# Altium PCB BattBoard.PcbDoc
Units mil, origin at the board's own origin, x right, y up, seen from the top; angles counter-clockwise.
Board outline 4473.33 x 4473.33 mil, 2 copper layers (Top Layer, Bottom Layer); 106 components, 71 nets, 399 pads, 54 vias.
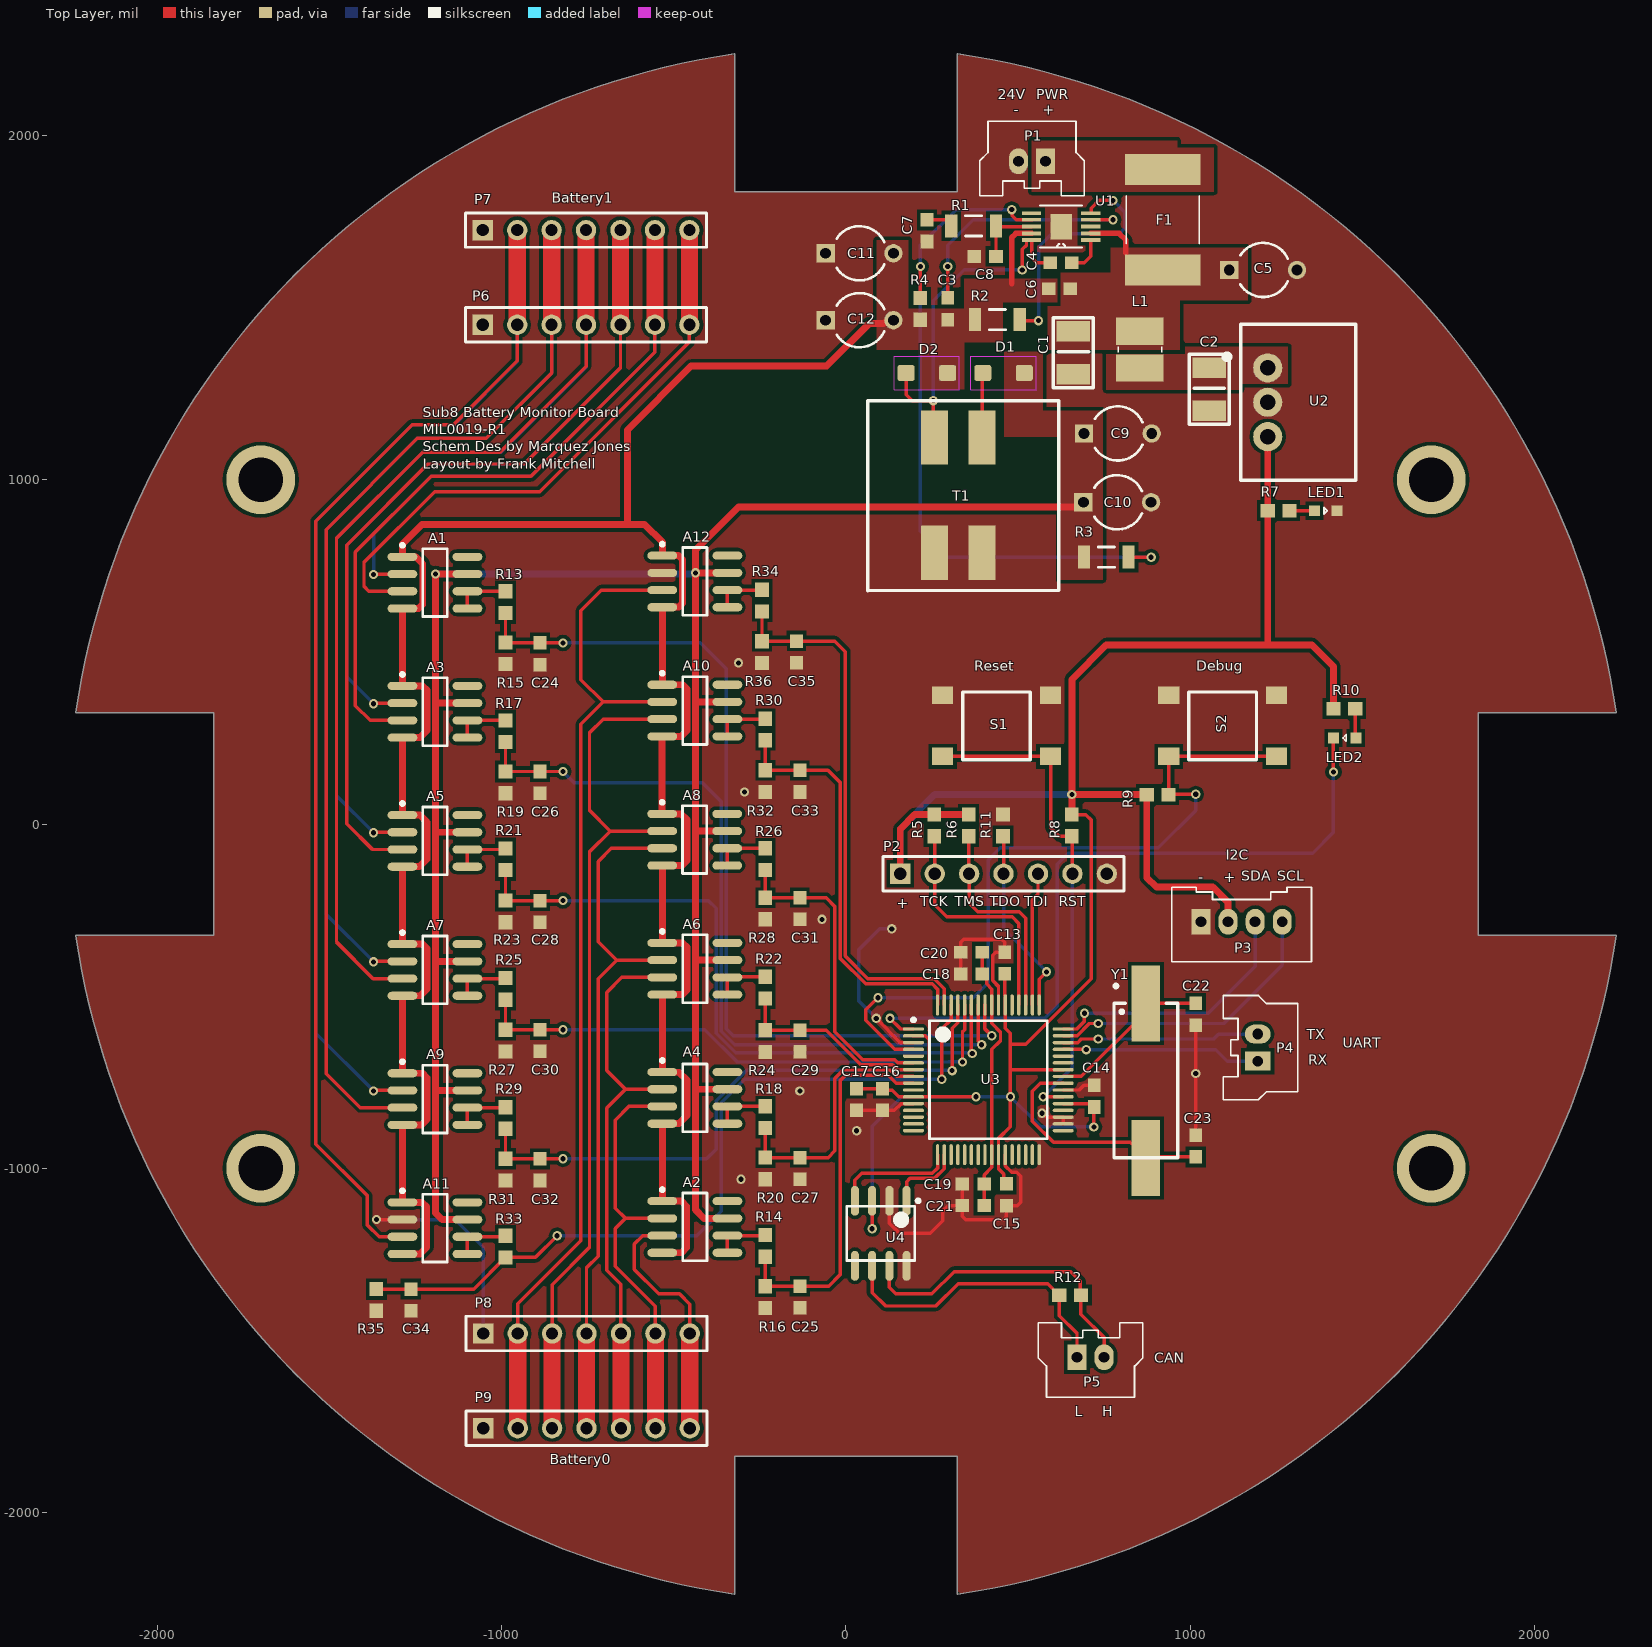
[diagram p0: Top Layer view]
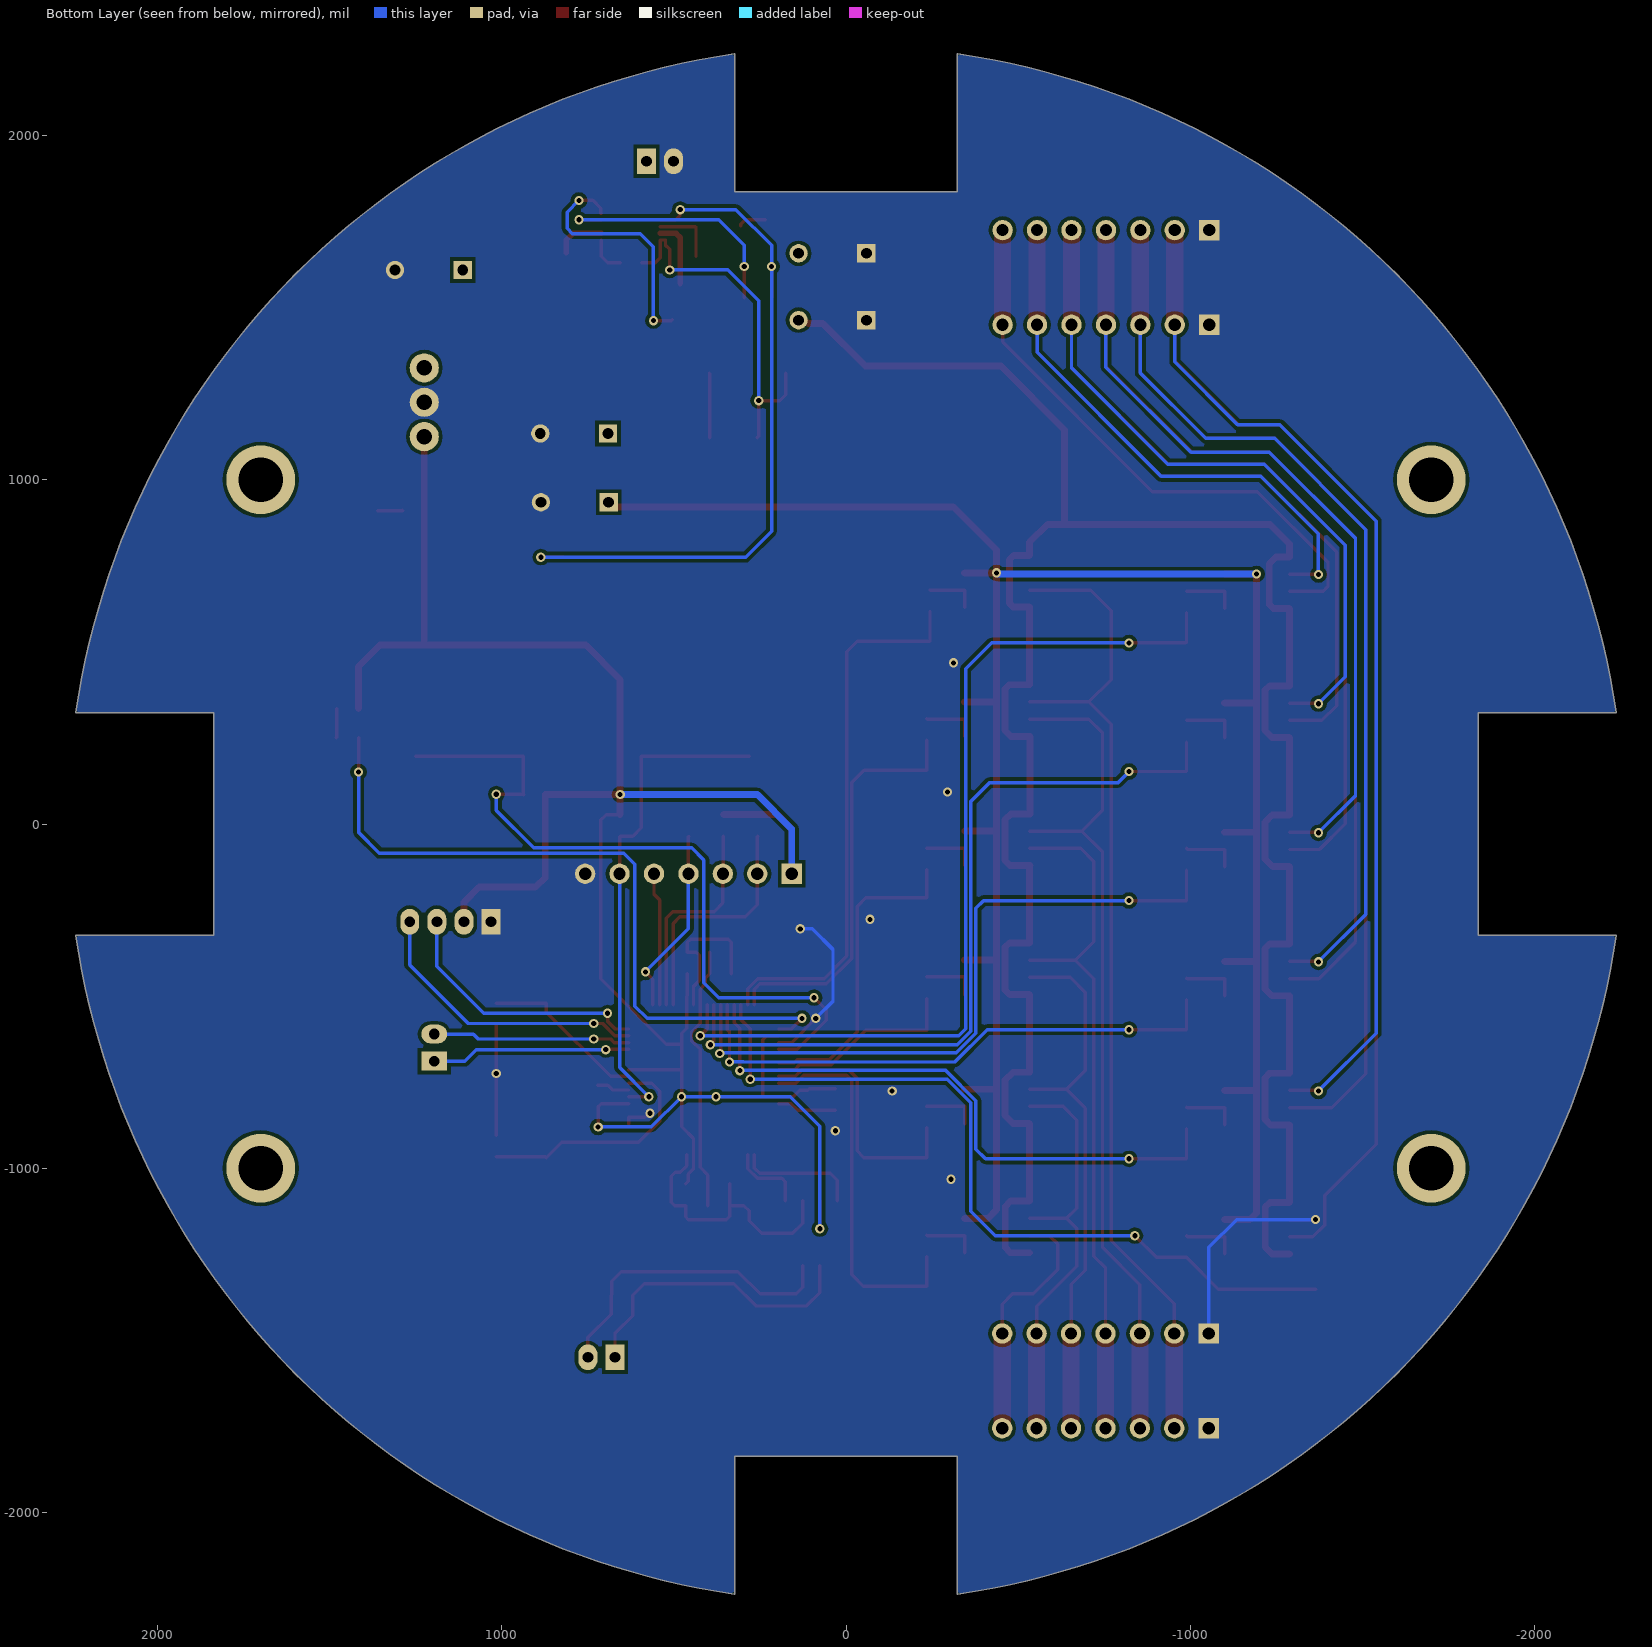
[diagram p1: Bottom Layer view, seen from below]

## Layer stack, top to bottom
Top Solder: solder mask 0.4, Solder Resist, Dk 3.5
Top Layer: signal copper 1.4
Dielectric 1: dielectric 12.6, FR-4, Dk 4.8
Bottom Layer: signal copper 1.4
Bottom Solder: solder mask 0.4, Solder Resist, Dk 3.5

## Board outline
-2236.67,-323.85 -1836.67,-323.85 -1836.67,323.85 -2236.67,323.85 cw(c0,0) -323.85,2236.67 -323.85,1836.67 323.85,1836.67 323.85,2236.67 cw(c0,0) 2236.67,323.85 1836.67,323.85 1836.67,-323.85 2236.67,-323.85 cw(c0,0) 323.85,-2236.67 323.85,-1836.67 -323.85,-1836.67 -323.85,-2236.67 cw(c0,0)

## Design rules (kind name [scope] priority, off if disabled: settings)
Clearance [All] p1: gap=10 ignorepadtopadclearanceinfootprint=FALSE except(0: Arc-Hole Track-Hole SMDPad-Hole THPad-Hole Via-Hole Fill-Hole Poly-Hole Region-Hole Text-Hole; 5: Track-Track Track-SMDPad SMDPad-SMDPad; 7: Track-Via)
HoleSize [All] p1: absolutevalues=TRUE maxlimit=150 minlimit=10 maxpercent=80.000 minpercent=20.000
MinimumAnnularRing [All] p1: minimumring=7
MinimumSolderMaskSliver [All] p1: minsoldermaskwidth=1
PolygonConnect PolygonConnect_2 [All vs IsNamedPolygon('top_gnd') Or  IsNamedPolygon('-12v_poly') Or  IsNamedPolygon('bottom_gnd') Or  IsNamedPolygon('+12v_poly') Or  IsNamedPolygon('cap_poly') Or  IsNamedPolygon('24v_poly') Or  IsNamedPolygon('vfused_poly')] p1: connectstyle=Direct reliefconductorwidth=10 reliefentries=4 polygonreliefangle="90 Angle" airgapwidth=10
PolygonConnect PolygonConnect_1 [All vs IsNamedPolygon('top_gnd')] p2: connectstyle=Direct reliefconductorwidth=10 reliefentries=4 polygonreliefangle="90 Angle" airgapwidth=10
PolygonConnect [All] p3: connectstyle=Relief reliefconductorwidth=10 reliefentries=4 polygonreliefangle="90 Angle" airgapwidth=10
RoutingVias [All] p1: holewidth=10 width=22 viastyle="Through Hole" minholewidth=10 minwidth=22 maxholewidth=100 maxwidth=150
SilkToSolderMaskClearance [IsPad] p1: minsilkscreentomaskgap=5 clearancetoexposedcopper=TRUE
SolderMaskExpansion [All] p1: expansion=4
Width [All] p1: maxlimit=150 minlimit=8 preferedwidth=10
27 further rules are at their usual default settings.

## Classes and differential pairs
component class Tiva_C_Base: C13 C14 C15 C16 C17 C18 C19 C20 C21 C22 C23 LED1 LED2 P3 P4 P5 R5 R6 R7 R8 R9 R10 R11 R12 S1 S2 U3 U4 Y1
component class Power: C1 C2 C3 C4 C5 C6 C7 C8 C9 C10 C11 C12 D1 D2 L1 P1 R1 R2 R3 R4 T1 U1 U2
component class Batt_Op_Amp: A1 A2 A3 A4 A5 A6 A7 A8 A9 A10 A11 A12 C24 C25 C26 C27 C28 C29 C30 C31 C32 C33 C34 C35 P6 P7 P8 P9 R13 R14 R15 R16 R17 R18 R19 R20 R21 R22 R23 R24 R25 R26 R27 R28 R29 R30 R31 R32 R33 R34 R35 R36

## Components (designator, comment, footprint, x,y, rotation, side; value= is the part's Value field where it differs from the comment)
A1 "INA105LKU/2K5" SOIC-8N -1194.02,701 r0 top
A2 "INA105LKU/2K5" SOIC-8N -439.02,-1170.5 r0 top
A3 "INA105LKU/2K5" SOIC-8N -1194.02,326 r0 top
A4 "INA105LKU/2K5" SOIC-8N -439.02,-795.5 r0 top
A5 "INA105LKU/2K5" SOIC-8N -1194.02,-49 r0 top
A6 "INA105LKU/2K5" SOIC-8N -439.02,-420.5 r0 top
A7 "INA105LKU/2K5" SOIC-8N -1194.02,-424 r0 top
A8 "INA105LKU/2K5" SOIC-8N -439.53,-45.5 r0 top
A9 "INA105LKU/2K5" SOIC-8N -1194.02,-799 r0 top
A10 "INA105LKU/2K5" SOIC-8N -439.02,329.5 r0 top
A11 "INA105LKU/2K5" SOIC-8N -1194.02,-1174 r0 top
A12 "INA105LKU/2K5" SOIC-8N -439.02,704.5 r0 top
C1 "Cap" CAP1210 660,1432.09 r90 top value=10uF
C2 "Cap" CAP1210 1055,1325.98 r90 top value=10uF
C3 "EEHZA1H101P" CAPC0603 295.48,1496.5 r270 top value=0.1uF
C4 "Cap" CAPC0603 624.37,1630.15 r180 top value=0.1uF
C5 "Cap2" CAPR5-4X5 1211.69,1609.33 r0 top value=10uF
C6 "Cap" CAPC0603 620.43,1554.88 r180 top value=1uF
C7 "Cap" CAPC0603 234.96,1723.5 r270 top value=0.15uF
C8 "Cap" CAPC0603 404.21,1648.85 r180 top value=0.33uF
C9 "Cap2" CAPR5-4X5 789.49,1134.53 r0 top value=22uF
C10 "Cap2" CAPR5-4X5 787.91,934.53 r0 top value=22uF
C11 "Cap2" CAPR5-4X5 39.21,1657.75 r0 top value=22uF
C12 "Cap2" CAPR5-4X5 39.21,1463.42 r0 top value=22uF
C13 "Cap" CAPC0603 460.98,-404 r90 top value=0.1uF
C14 "Cap" CAPC0603 720.98,-790.5 r90 top value=0.1uF
C15 "Cap" CAPC0603 465.98,-1076.99 r270 top value=0.1uF
C16 "Cap" CAPC0603 105.98,-800.5 r270 top value=0.1uF
C17 "Cap" CAPC0603 30.98,-800.22 r270 top value=2.0uF
C18 "Cap" CAPC0603 364.49,-435.5 r180 top value=0.1uF
C19 "Cap" CAPC0603 369.49,-1045.5 r180 top value=0.1uF
C20 "Cap" CAPC0603 364.49,-372.5 r180 top value=1.0uF
C21 "Cap" CAPC0603 369.49,-1108.49 r180 top value=2.2uF
C22 "Cap" CAPC0603 1015.98,-552.5 r270 top value=10pF
C23 "Cap" CAPC0603 1015.98,-935.5 r90 top value=10pF
C24 "Cap" CAPC0603 -889.02,494.5 r270 top value=100nF
C25 "Cap" CAPC0603 -134.02,-1374 r270 top value=100nF
C26 "Cap" CAPC0603 -889.02,121 r270 top value=100nF
C27 "Cap" CAPC0603 -134.02,-1000.5 r270 top value=100nF
C28 "Cap" CAPC0603 -889.02,-254 r270 top value=100nF
C29 "Cap" CAPC0603 -134.02,-630.5 r270 top value=100nF
C30 "Cap" CAPC0603 -889.02,-629 r270 top value=100nF
C31 "Cap" CAPC0603 -134.02,-245.5 r270 top value=100nF
C32 "Cap" CAPC0603 -889.02,-1004 r270 top value=100nF
C33 "Cap" CAPC0603 -134.02,124.5 r270 top value=100nF
C34 "Cap" CAPC0603 -1264.02,-1382.5 r270 top value=100nF
C35 "Cap" CAPC0603 -144.02,499.5 r270 top value=100nF
D1 "Schottky" DSS16UTR 457.64,1310 r180 top
D2 "Schottky" DSS16UTR 234.96,1310 r0 top
F1 "PTC Fuse" PTC7451X11N 920,1755 r270 top value=1.1A
L1 "Inductor" RLS567 853.7,1378.15 r270 top
LED1 "LED" LED0603 1393.31,910 r0 top
LED2 "LED" LED0603 1448.42,250 r180 top
P1 "2-pin Vert Sherlock" MOLEX-HDR-1X2-SHERLOCK-VERT 579.72,1925 r0 top
P2 "Header 7" HDR1X7 157.68,-144.55 r0 top
P3 "" MOLEX-HDR-1X4-SHERLOCK-VERT 1030.98,-284 r180 top
P4 "2-pin Vert Sherlock" MOLEX-HDR-1X2-SHERLOCK-VERT 1195.98,-689 r270 top
P5 "2-pin Vert Sherlock" MOLEX-HDR-1X2-SHERLOCK-VERT 670.98,-1549 r180 top
P6 "Header 7" HDR1X7 -1055,1450 r0 top
P7 "Header 7" HDR1X7 -1055,1725 r0 top
P8 "Header 7" HDR1X7 -1053.7,-1480 r0 top
P9 "Header 7" HDR1X7 -1053.7,-1755 r0 top
R1 "Res" RES1206 370.74,1737.42 r180 top value=11.8k
R2 "Res" RES1206 439.96,1465 r180 top value=400k
R3 "Res" RES1206 756.02,775 r0 top value=29.4k
R4 "Res" RES0603 216.26,1496.5 r270 top value=1k
R5 "Res" RES0603 255.98,-4.08 r270 top value=10k
R6 "Res" RES0603 355.98,-4.08 r270 top value=10k
R7 "Res" RES0603 1256.5,910 r0 top value=1k
R8 "Res" RES0603 655.98,-4.08 r270 top value=10k
R9 "Res" RES0603 905,85.45 r0 top value=10k
R10 "Res" RES0603 1447.44,335 r0 top value=1k
R11 "Res" RES0603 455.98,-4.08 r90 top value=10k
R12 "Res" RES0603 650.98,-1368.55 r0 top value=120
R13 "Res" RES0603 -989.02,644.5 r270 top value=10k
R14 "Res" RES0603 -234.02,-1225.5 r270 top value=10k
R15 "Res" RES0603 -989.02,496 r270 top value=10k
R16 "Res" RES0603 -234.02,-1374 r270 top value=10k
R17 "Res" RES0603 -989.02,269.5 r270 top value=10k
R18 "Res" RES0603 -234.02,-851.4 r270 top value=10k
R19 "Res" RES0603 -989.02,121 r270 top value=10k
R20 "Res" RES0603 -234.02,-1000.5 r270 top value=10k
R21 "Res" RES0603 -989.02,-102.5 r270 top value=10k
R22 "Res" RES0603 -234.02,-475.5 r270 top value=10k
R23 "Res" RES0603 -989.02,-254 r270 top value=10k
R24 "Res" RES0603 -234.02,-630.5 r270 top value=10k
R25 "Res" RES0603 -989.02,-479 r270 top value=10k
R26 "Res" RES0603 -234.02,-101.99 r270 top value=10k
R27 "Res" RES0603 -989.02,-629 r270 top value=10k
R28 "Res" RES0603 -234.02,-245.5 r270 top value=10k
R29 "Res" RES0603 -989.02,-854 r270 top value=10k
R30 "Res" RES0603 -234.02,274.5 r270 top value=10k
R31 "Res" RES0603 -989.02,-1004 r270 top value=10k
R32 "Res" RES0603 -234.02,124.5 r270 top value=10k
R33 "Res" RES0603 -989.02,-1227.5 r270 top value=10k
R34 "Res" RES0603 -244.02,648.99 r270 top value=10k
R35 "Res" RES0603 -1364.02,-1382.5 r270 top value=10k
R36 "Res" RES0603 -244.02,499.5 r270 top value=10k
S1 "Button" PTS645xxxxSMTR92 437.28,285 r180 top
S2 "Button" PTS645xxxxSMTR92 1093.98,285 r180 top
T1 "Ind Coup" SOP4 257.56,787.93 r90 top
U1 "TPS54160DGQ" SOIC-11 625,1735.31 r180 top
U2 "R-78C3.3-1.0" R-78C3.3-1.0 1225,1325 r270 top
U3 "TM4C123GH6PMT7R" TM4C123GH6PMT7R_L 413.5,-743.13 r0 top value=Value
U4 "SN65HVD230" SOIC-8pin 100.98,-1189 r270 top
Y1 "ABLS2-12.000MHZ-D4Y-T" HC49/US 870.98,-745.5 r270 top

## Footprints (in the part's own frame and the unit in brackets; to place one, negate y for a bottom-side part, rotate by r counter-clockwise, add the part's x,y. Pads: shape width x height; smd on the part's side, far side on the other; paste and mask are expansions set on the pad)
CAP1210 [mm]
  rect 1.5x2.5 smd: 1(-0.02,0) 2(-3.2,0)
  silkscreen extent -4.2,-1.48 0.97,1.48, body extent -3.22,-1.25 0,1.26, height 2.5
CAPC0603 [mm] "Chip Capacitor, 2-Leads, Body 1.60x0.80mm, IPC Medium Density"
  rect 1x0.95 smd: 1(-0.8,0) 2(0.8,0)
  body extent -0.88,-0.48 0.87,0.48, height 0.8
CAPR5-4X5 [mm] "Capacitor; 2 Leads"
  rect 1.35x1.35 hole 0.8: 1(-2.5,0)
  round 1.35 hole 0.8: 2(2.5,0)
  silkscreen extent -1.69,-2 1.82,2
DSS16UTR [mm] "Diode Schottky 60V 1A"
  rrect25% 1.25x1.16 smd: A(1.53,0) C(-1.53,0)
  Top Layer keep-out lines w0.05: 2.405,1.225 -2.405,1.225 -2.405,-1.225 2.405,-1.225 2.405,1.225
HC49/US [mm]
  rect 5.6x2.1 smd: 1(-5.7,0) 2(5.7,0)
  silkscreen extent -7.11,-2.35 5.7,2.35, body extent -6.35,-2.35 6.35,2.35, height 3.16
HDR1X7 [mm] "Connector; Header; 7 Position"
  rect 1.5x1.5 hole 0.9: 1(0,0)
  round 1.5 hole 0.9: 2(2.54,0) 3(5.08,0) 4(7.62,0) 5(10.16,0) 6(12.7,0) 7(15.24,0)
  silkscreen extent -1.27,-1.27 16.51,1.27
LED0603 [mm] "Chip LED, 2-Leads, Body 1.60x0.80mm, IPC Medium Density"
  rect 0.8x0.8 smd: A(-0.825,0) C(0.825,0)
  silkscreen extent -0.12,-0.25 0.12,0.25, body extent -0.88,-0.48 0.87,0.47, height 0.8
MOLEX-HDR-1X2-SHERLOCK-VERT [mil]
  rect 55x75 hole 31.5: 1(0,0)
  oval 55x75 hole 31.5: 2(-78.74,0)
  silkscreen extent -191,-100 112,116, body extent -192,-102 112,117, height 335
MOLEX-HDR-1X4-SHERLOCK-VERT [mm]
  rect 1.397x1.905 hole 0.8: 1(0,0)
  oval 1.397x1.905 hole 0.8: 2(-2,0) 3(-4,0) 4(-6,0)
  silkscreen extent -8.15,-2.55 2.15,2.95, body extent -8.13,-2.57 2.17,2.98, height 8.5
PTC7451X11N [mm] "Chip PTC, 2920, 7351 metric 2-Leads, Body 7.36x5.12mm, IPC Medium Density"
  rect 2.3x5.6 smd: 1(-3.7,0) 2(3.7,0)
  silkscreen extent -1.75,-2.7 1.75,2.7, body extent -3.99,-2.72 3.99,2.72, height 1.15
PTS645xxxxSMTR92 [mm] "PTS645 Series SMT 6 mm Tactile Switch"
  rect 1.555x1.3 smd: A(-3.975,2.25) A(3.975,2.25) B(-3.975,-2.25) B(3.975,-2.25)
  silkscreen extent -2.5,-2.5 2.5,2.5, body extent -3,-3 3,3, height 4.5
R-78C3.3-1.0 [mm] "CONV DC/DC 1A 3.3V OUT SIP VERT"
  round 2.15 hole 1.15: 1(0,0) 2(2.54,0) 3(5.08,0)
  Bottom Layer region: 0.457,-3.048
  silkscreen extent -3.21,-3.05 8.29,6.5, body extent -3.3,-2.03 8.38,6.6, height 10.4
RES0603 [mm] "Chip Resistor, 2-Leads, Body 1.60x0.80mm, IPC Medium Density"
  rect 1.05x1 smd: 1(-0.8,0) 2(0.8,0)
  body extent -0.88,-0.48 0.87,0.47, height 0.8
RES1206 [mm] "Chip Resistor, 2-Leads, Body 3.20x1.60mm, IPC Medium Density"
  rect 0.9x1.7 smd: 1(-1.65,0) 2(1.65,0)
  silkscreen extent -0.6,-0.75 0.6,0.75, body extent -1.73,-0.87 1.73,0.88, height 0.7
RLS567 [mm]
  rect 2x3.5 smd: 1(-1.35,0) 2(1.35,0)
  silkscreen extent -0.2,-1.6 0.2,1.6, body extent -2.54,-1.9 2.54,1.91, height 2.6
SOIC-8N [mm] "LM317 Footprint"
  oval 2.2x0.6 smd: 1(-2.4,1.905) 2(-2.4,0.635) 3(-2.4,-0.635) 4(-2.4,-1.905) 5(2.4,-1.905) 6(2.4,-0.635) 7(2.4,0.635) 8(2.4,1.905)
  silkscreen extent -2.52,-2.5 0.9,2.88, body extent -2,-2.5 2,2.5, height 1.75
SOIC-8pin [mm] "For 296-1345-1-ND"
  oval 2.2x0.6 smd: 1(-2.4,1.905) 2(-2.4,0.635) 3(-2.4,-0.635) 4(-2.4,-1.905) 5(2.4,-1.905) 6(2.4,-0.635) 7(2.4,0.635) 8(2.4,1.905)
  silkscreen extent -2.52,-2.5 2,2.88, body extent -2,-2.5 2,2.5, height 1.75
SOIC-11 [mil]
  rect 56x11 smd: 1(-86,39) 2(-86,20) 3(-86,0) 4(-86,-20) 5(-86,-39) 6(86,-39) 7(86,-20) 8(86,0) 9(86,20) 10(86,39)
  rect 62x74 smd: 11(0,0)
  silkscreen extent -61,-61 61,61
SOP4 [mm]
  rect 4x2 smd: 1(0,0) 2(0,-3.5) 3(8.5,-3.5) 4(8.5,0)
  silkscreen extent -2.8,-9.16 11.22,4.92
TM4C123GH6PMT7R_L [mm]
  oval 1.55x0.25 smd paste-0.102 mask+0.051: 1(-5.525,3.75) 2(-5.525,3.25) 3(-5.525,2.75) 4(-5.525,2.25) 5(-5.525,1.75) 6(-5.525,1.25) 7(-5.525,0.75) 8(-5.525,0.25) 9(-5.525,-0.25) 10(-5.525,-0.75) 11(-5.525,-1.25) 12(-5.525,-1.75) 13(-5.525,-2.25) 14(-5.525,-2.75) 15(-5.525,-3.25) 16(-5.525,-3.75) 33(5.525,-3.75) 34(5.525,-3.25) 35(5.525,-2.75) 36(5.525,-2.25) 37(5.525,-1.75) 38(5.525,-1.25) 39(5.525,-0.75) 40(5.525,-0.25) 41(5.525,0.25) 42(5.525,0.75) 43(5.525,1.25) 44(5.525,1.75) 45(5.525,2.25) 46(5.525,2.75) 47(5.525,3.25) 48(5.525,3.75)
  oval 0.25x1.55 smd paste-0.102 mask+0.051: 17(-3.75,-5.525) 18(-3.25,-5.525) 19(-2.75,-5.525) 20(-2.25,-5.525) 21(-1.75,-5.525) 22(-1.25,-5.525) 23(-0.75,-5.525) 24(-0.25,-5.525) 25(0.25,-5.525) 26(0.75,-5.525) 27(1.25,-5.525) 28(1.75,-5.525) 29(2.25,-5.525) 30(2.75,-5.525) 31(3.25,-5.525) 32(3.75,-5.525) 49(3.75,5.525) 50(3.25,5.525) 51(2.75,5.525) 52(2.25,5.525) 53(1.75,5.525) 54(1.25,5.525) 55(0.75,5.525) 56(0.25,5.525) 57(-0.25,5.525) 58(-0.75,5.525) 59(-1.25,5.525) 60(-1.75,5.525) 61(-2.25,5.525) 62(-2.75,5.525) 63(-3.25,5.525) 64(-3.75,5.525)
  silkscreen extent -5.65,-4.35 4.35,4.55, body extent 0,0 0.25,0.25, height 0.25

## Part data
C1 C2: library part CAP1210, "CAP CER 10UF 50V 20% X5R 1210", Supplier Part Number 1=587-2225-1-ND, Supplier 1=Digi-Key
C3: library part Cap, Supplier Part Number 1=1276-1000-1-ND, Supplier 1=Digi-Key
C4 C6 C7 C8 C13 C14 C15 C16 C17 C18 C19 C20 C21 C22 C23 C24 C25 C26 C27 C28 C29 C30 C31 C32 C33 C34 C35: Supplier Part Number 1=1276-1000-1-ND, Supplier 1=Digi-Key
C5 C9 C10 C11 C12: "Capacitor", PackageDescription="Capacitor; 2 Leads", PackageReference=CAPR5-4X5, Published=23-Sep-2002, Publisher="Altium Limited"
D1 D2: "Schottky Diode Template"
F1: library part PTC_Fuse, Supplier Part Number 1=507-1744-1-ND, Supplier 1=Digi-Key
L1: Inductance=RLS567, Supplier Part Number 1=?, Supplier 1=Digi-Key
LED1: Color=Green, Supplier Part Number 1=754-1122-1-ND, Supplier 1=Digi-Key
LED2: Color=Blue, Supplier Part Number 1=754-1122-1-ND, Supplier 1=Digi-Key
P1 P4 P5: library part MOLEX-HDR-1x2-SHERLOCK_VERT, "Header, Molex, 2mm Pitch Sherlock Header, Single Row, Vertical, 2 Circuits, Length 3.3mm, 0353620250"
P2 P6 P7 P8 P9: "Header, 7-Pin", LatestRevisionDate=17-Jul-2002, LatestRevisionNote="Re-released for DXP Platform.", Publisher="Altium Limited"
P3: library part MOLEX-HDR-1x4-SHERLOCK_VERT, "Header, Molex, 2mm Pitch Sherlock Header, Single Row, Vertical, 4 Circuits, Length 3.3mm, 0353620450"
R1 R2 R3 R4 R5 R6 R7 R8 R9 R10 R11 R12 R13 R14 R15 R16 R17 R18 R19 R20 R21 R22 R23 R24 R25 R26 R27 R28 R29 R30 R31 R32 R33 R34 R35 R36: Supplier Part Number 1=RMCF0603JT10K0CT-ND, Supplier 1=Digi-Key
S1 S2: "SPST Button", Supplier Part Number 1=CKN9087CT-ND, Supplier 1=Digi-Key
T1: library part "Trans Cupl", "Transformer (Coupled Inductor Model)", LatestRevisionDate=17-Jul-2002, LatestRevisionNote="Re-released for DXP Platform.", PackageDescription="Transformer; 4 Leads", PackageReference=TRF_4, Published=8-Jun-2000, Publisher="Altium Limited"
U1: "Buck Switching Regulator IC Positive Adjustable 0.8V 1 Output 1.5A 10-TFSOP, 10-MSOP _0.118, 3.00mm Width_ Exposed Pad", Package="TFSOP-10 Texas Instruments", Availability=Unavailable, MF="Texas Instruments", MP=TPS54160DGQ, Price=None, SnapEDA_Link=https://www.snapeda.com/parts/TPS54160DGQ/Texas%20Instruments/view-part/393939/?ref=snap
U2: "CONV DC/DC 1A 3.3V OUT SIP VERT", Supplier Part Number 1=945-1394-5-ND, Supplier 1=Digi-Key
U3: "Imported", Alternate_PartNumber=TM4C123GH6PMT, Manufacturer="Texas Instruments", PartNumber=TM4C123GH6PMTR, CompType=IC, MountType=SMT, PackageReference=PM0064A, PIN_COUNT=64, RefDes=RefDes, RoHS=Y, TYPE=TYPE
U4: "3.3V CAN Bus Transceiver"
Y1: "12MHz ±30ppm Crystal 18pF 50 Ohm -40°C ~ 85°C Surface Mount HC49/US", Supplier Part Number 1=535-9869-1-ND, Supplier 1=Digi-Key

## Free pads (board coordinates)
  round 200 hole 130: ""(-1700,-1000) ""(-1700,1000) ""(1700,-1000) ""(1700,1000)

## Via types
v1: diameter 27, hole 15, Top Layer to Bottom Layer, tented both sides, 54 vias

## Nets (pads, with @x,y where several pads share a name; then routed paths per layer and width w, separated by ;. In a path a pad name is that pad's centre, name@x,y a point inside that pad or via, vN(x,y) a via of type N, cw(c..) or ccw(c..) an arc to the next point about the centre after c; other vN are vias at no path point)
3V3: C13.1 C14.1 C15.1 C16.1 C17.1 P2.1 P3.2 R5.1 R6.1 R7.1 R8.1 R9.1 R10.1 U2.3 U3.2 U3.11 U3.26 U3.37 U3.42 U3.54 U4.3 | length 7196.9
  Top Layer w10: C17.1 105.71,-768.73 C16.1 110.5,-773.52 133.83,-773.52 152.66,-792.35 U3.11 242.24,-792.35 ; v1(75.98,-1175.5) U4.3 ; U3.2 230.43,-615.18 242.24,-626.99 242.24,-792.35 ; v1(377.68,-792.35) 242.24,-792.35 ; C13.1 460.98,-498.45 462.72,-500.18 U3.54 462.72,-592.86 477.68,-607.82 477.68,-639.61 ; C15.1 458.38,-1037.89 458.38,-1016.67 443.03,-1001.32 U3.26 443.03,-913.65 477.68,-879 v1(477.68,-792.35) 477.68,-715.98 ; U3.37 711.02,-812.03 C14.1 720,-822.98 v1(720,-880) ; U3.42 480.05,-713.61 477.68,-715.98 ; R8.1 696.3,27.42 712.01,11.71 712.01,-449.37 521.77,-639.61 477.68,-639.61 ; 477.68,-715.98 477.68,-639.61
  Top Layer w20: P2.1 157.68,-14.55 199.65,27.42 R5.1 R6.1 ; R8.1 v1(655.98,85.45) ; P3.2 1109.72,-227.31 1065.42,-183 901.51,-183 873.5,-155 R9.1 v1(655.98,85.45) ; U2.3 R7.1 1225,522.95 1222.05,520 ; R10.1 1415.94,458.03 1353.98,520 1222.05,520 ; v1(655.98,85.45) 655.98,420.09 755.89,520 1222.05,520
  Bottom Layer w10: v1(75.98,-1175.5) 75.98,-877.9 161.54,-792.35 v1(377.68,-792.35) v1(477.68,-792.35) 565.33,-880 v1(720,-880)
  Bottom Layer w20: P2.1 157.68,-14.55 257.68,85.45 v1(655.98,85.45)
24V: F1.1 P1.1
+12V: A1.7 A2.7 A3.7 A4.7 A5.7 A6.7 A7.7 A8.7 A9.7 A10.7 A11.7 A12.7 C9.1 C10.1 D1.C R3.1 | length 6845.4
  Top Layer w20: A11.7 -1172.87,-1149 -1192.32,-1129.55 -1192.32,-774.55 ; A9.7 -1191.77,-774 -1192.32,-774.55 ; A7.7 -1191.77,-399 -1192.32,-399.55 ; A5.7 -1191.77,-24 -1192.32,-24.55 ; A3.7 -1192.05,351 -1192.32,350.72 ; A1.7 v1(-1192.32,726) -1192.32,350.72 ; A8.7 -437.32,-20.5 ; A2.7 -412.32,-1145.5 -437.32,-1120.5 -437.32,-769.55 ; A4.7 -436.38,-770.5 -437.32,-769.55 ; A6.7 -436.38,-395.5 -437.32,-394.55 ; A10.7 -437.32,354.5 ; A12.7 v1(-437.32,729.5) ; C10.1 675.33,920.37 -312.4,920.37 -437.32,795.45 v1(-437.32,729.5) ; -1192.32,-774.55 -1192.32,-399.55 ; -1192.32,-399.55 -1192.32,-24.55 ; -1192.32,-24.55 -1192.32,350.72 ; -437.32,-769.55 -437.32,-394.55 ; -437.32,-394.55 -437.32,-20.5 ; -437.32,-20.5 -437.32,354.5 ; -437.32,354.5 v1(-437.32,729.5)
  Bottom Layer w20: v1(-1192.32,726) -1192.24,725.92 -440.91,725.92 v1(-437.32,729.5)
-12V: A1.1 A1.4 A2.1 A2.4 A3.1 A3.4 A4.1 A4.4 A5.1 A5.4 A6.1 A6.4 A7.1 A7.4 A8.1 A8.4 A9.1 A9.4 A10.1 A10.4 A11.1 A11.4 A12.1 A12.4 C3.2 C6.2 C11.2 C12.2 D2.A R2.2 R4.2 U1.9 | length 7733.9
  Top Layer w16: 481.26,1570 481.26,1702.84 493.73,1715.31 U1.9
  Top Layer w20: A11.4 -1288.44,-1248.93 -1237.95,-1248.93 -1217.64,-1228.62 -1217.64,-1112.31 -1230.94,-1099 A11.1 A9.4 -1233.7,-874 -1217.32,-857.62 -1217.32,-737.13 -1230.45,-724 A9.1 A7.4 -1237.2,-499 -1217.32,-479.12 -1217.32,-361.32 -1229.65,-349 A7.1 A5.4 -1287.94,-123.44 -1238.44,-123.44 -1217.32,-102.32 -1217.32,5.06 -1238.07,25.81 -1288.31,25.81 A5.1 A3.4 -1237.52,251 -1217.32,271.2 -1217.32,388.68 -1229.65,401 A3.1 A1.4 -1288.45,626.06 -1241.16,626.06 -1229.45,637.77 -1229.45,756.12 -1248.64,775.31 -1287.81,775.31 A1.1 -1288.5,813.64 -1232.15,870 -635,870 ; A2.4 -478.13,-1245.5 -462.64,-1230 -462.64,-1110.81 -477.95,-1095.5 A2.1 A4.4 -532.81,-869.8 -484.97,-869.8 -462.32,-847.15 -462.32,-743.83 -484.96,-721.19 -532.81,-721.19 A4.1 A6.4 -475.2,-495.5 -462.32,-482.62 -462.32,-357.82 -474.65,-345.5 A6.1 -533.5,-121.01 A8.4 -476.87,-120.5 -462.32,-105.94 -462.32,12.85 -478.98,29.5 A8.1 -534.02,253.99 A10.4 -479.2,254.5 -462.32,271.38 -462.32,392.18 -474.65,404.5 A10.1 A12.4 -532.81,630.2 -485.47,630.2 -474.45,641.22 -474.45,767.79 -486.16,779.5 A12.1 -533.5,818.53 -584.97,870 -635,870 ; C12.2 131.29,1457.08 112.84,1457.08 109.34,1453.58 67.56,1453.58 -56.02,1330 -450,1330 -635,1145 -635,870
B0_C0_ADC_CH5: C35.1 R34.2 R36.1 U3.63 | length 1599.3
  Top Layer w10: R34.2 R36.1 C35.1 -32.87,531 -2.32,500.45 -2.32,-383.34 63.34,-449 256.53,-449 285.55,-478.02 U3.63
B0_C1_ADC_CH4: C33.1 R30.2 R32.1 U3.64 | length 1195.3
  Top Layer w10: R30.2 R32.1 C33.1 -52.32,156 -17.32,121 -17.32,-389.55 57.68,-464.55 250.87,-464.55 265.87,-479.55 U3.64
B0_C2_ADC_CH0: C31.1 R26.2 R28.1 U3.6 | length 922.4
  Top Layer w10: R26.2 R28.1 C31.1 -57.87,-214 -32.32,-239.55 -32.32,-603.34 48.89,-684.55 141.32,-684.55 150.69,-693.92 U3.6
B0_C3_ADC_CH1: C29.1 R22.2 R24.1 U3.7 | length 569.5
  Top Layer w10: R22.2 R24.1 C29.1 -57.87,-599 42.68,-699.55 135.1,-699.55 149.16,-713.61 U3.7
B0_C4_ADC_CH2: C27.1 R18.2 R20.1 U3.8 | length 752.4
  Top Layer w10: R18.2 R20.1 C27.1 -51.77,-969 -32.32,-949.55 -32.32,-739.28 -7.59,-714.55 128.89,-714.55 147.63,-733.29 U3.8
B0_C5_ADC_CH3: C25.1 R14.2 R16.1 U3.9 | length 1109.5
  Top Layer w10: R14.2 R16.1 C25.1 -50.28,-1342.5 -17.32,-1309.55 -17.32,-745.5 -1.38,-729.55 122.68,-729.55 146.1,-752.98 U3.9
B0_CELL0: A10.2 A12.3 P8.2 P9.2 | length 2937.7
  Top Layer w10: P8.2 -953.7,-1393.7 -770,-1210 -770,290 -705.5,354.5 ; A10.2 -705.5,354.5 ; A12.3 -710.5,679.5 -770,620 -770,419.01 -705.5,354.5
  Top Layer w50: P9.2 P8.2
B0_CELL1: A8.2 A10.3 P8.3 P9.3 | length 2493.5
  Top Layer w10: P8.3 -853.7,-1338.7 -745,-1230 -745,-81.01 -684.49,-20.5 ; A8.2 -684.49,-20.5 ; A10.3 -705.5,304.5 -745,265 -745,40.02 -684.49,-20.5
  Top Layer w50: P9.3 P8.3
B0_CELL2: A6.2 A8.3 P8.4 P9.4 | length 2039.2
  Top Layer w10: P8.4 -753.7,-1288.7 -720,-1255 -720,-449 -666.5,-395.5 ; A8.3 -681.5,-70.5 -720,-109 -720,-341.99 -666.5,-395.5 ; A6.2 -666.5,-395.5
  Top Layer w50: P9.4 P8.4
B0_CELL3: A4.2 A6.3 P8.5 P9.5 | length 1614.4
  Top Layer w10: P8.5 -653.7,-1337.31 -695,-1296.01 -695,-825 -640.5,-770.5 ; A4.2 -640.5,-770.5 ; A6.3 -650.94,-445.5 -695,-489.55 -695,-715.99 -640.5,-770.5
  Top Layer w50: P9.5 P8.5
B0_CELL4: A2.2 A4.3 P8.6 P9.6 | length 1227.5
  Top Layer w10: P8.6 -553.7,-1401.3 -670,-1285 -670,-1175 -640.5,-1145.5 ; A2.2 -640.5,-1145.5 ; A4.3 -630.5,-820.5 -670,-860 -670,-1115.99 -640.5,-1145.5
  Top Layer w50: P9.6 P8.6
B0_CELL5: A2.3 P8.7 P9.7 | length 728.8
  Top Layer w10: A2.3 -590.5,-1195.5 -615,-1220 -615,-1294 -544,-1365 -483.7,-1365 -453.7,-1395 P8.7
  Top Layer w50: P9.7 P8.7
B1_C0_ADC_CH6: C34.1 R33.2 R35.1 U3.62 | length 2306.6
  Top Layer w10: R35.1 C34.1 -1081.02,-1351.01 R33.2 -902.01,-1259 v1(-839.02,-1196.01) ; v1(278.35,-741.39) 278.35,-594.83 305.24,-567.94 U3.62
  Bottom Layer w10: v1(-839.02,-1196.01) -433.33,-1196.01 -362.32,-1125 -362.32,-809.55 -294.17,-741.39 v1(278.35,-741.39)
B1_C1_ADC_CH7: C32.1 R29.2 R31.1 U3.61 | length 1771.2
  Top Layer w10: R29.2 R31.1 C32.1 v1(-822.32,-972.5) ; v1(308.35,-716.39) 308.35,-593.88 324.92,-577.31 U3.61
  Bottom Layer w10: v1(-822.32,-972.5) -405.28,-972.5 -377.32,-944.55 -377.32,-803.34 -289.88,-715.89 307.85,-715.89 v1(308.35,-716.39)
B1_C2_ADC_CH8: C30.1 R25.2 R27.1 U3.60 | length 1622
  Top Layer w10: R25.2 R27.1 C30.1 v1(-822.32,-597.5) ; v1(338.35,-691.39) 338.35,-603.88 344.61,-597.62 U3.60
  Bottom Layer w10: v1(-822.32,-597.5) -410,-597.5 -316.11,-691.39 297.28,-691.39 297.78,-690.89 337.85,-690.89 v1(338.35,-691.39)
B1_C3_ADC_CH9: C28.1 R21.2 R23.1 U3.59 | length 1982.5
  Top Layer w10: R21.2 R23.1 C28.1 v1(-822.32,-222.5) ; U3.59 364.29,-664.03 v1(366.65,-666.39)
  Bottom Layer w10: v1(-822.32,-222.5) -399.37,-222.5 -377.32,-244.55 -377.32,-607.61 -320.38,-664.55 364.81,-664.55 v1(366.65,-666.39)
B1_C4_ADC_CH10: C26.1 R17.2 R19.1 U3.58 | length 2308
  Top Layer w10: R17.2 R19.1 C26.1 v1(-822.32,152.5) ; U3.58 383.98,-631.36 v1(394.02,-641.39)
  Bottom Layer w10: v1(-822.32,152.5) -790.28,120.45 -417.32,120.45 -362.32,65.45 -362.32,-601.39 -322.82,-640.89 393.52,-640.89 v1(394.02,-641.39)
B1_C5_ADC_CH11: C24.1 R13.2 R15.1 U3.57 | length 2681.4
  Top Layer w10: R13.2 R15.1 -987.52,526 C24.1 v1(-822.32,526) ; U3.57 403.66,-595.5 v1(423.35,-615.18)
  Bottom Layer w10: v1(-822.32,526) -422.87,526 -347.32,450.45 -347.32,-595.18 -327.32,-615.18 v1(423.35,-615.18)
B1_CELL0: A9.2 A11.3 P6.2 P7.2 | length 6074
  Top Layer w10: v1(-1372.32,-775.5) -1370.83,-774 A9.2 ; A11.3 -1356,-1199 -1390,-1165 -1390,-1080 -1540,-930 -1540,880 -1260,1160 -1140,1160 -955,1345 P6.2
  Top Layer w50: P6.2 P7.2
  Bottom Layer w10: v1(-1372.32,-775.5) -1540,-607.82 -1540,880 -1260,1160 -1137.14,1160 -955,1342.14 P6.2
B1_CELL1: A7.2 A9.3 P6.3 P7.3 | length 5481.4
  Top Layer w10: v1(-1372.32,-400.5) -1370.83,-399 A7.2 ; A9.3 -1411,-824 -1510,-725 -1510,855 -1245,1120 -1045,1120 -855,1310 P6.3
  Top Layer w50: P6.3 P7.3
  Bottom Layer w10: v1(-1372.32,-400.5) -1510,-262.82 -1510,855 -1245,1120 -1045,1120 -855,1310 P6.3
B1_CELL2: A5.2 A7.3 P6.4 P7.4 | length 4773.7
  Top Layer w10: v1(-1372.32,-25.5) -1370.83,-24 A5.2 ; A7.3 -1373.82,-449 -1480,-342.82 -1480,830 -1230,1080 -1005,1080 -755,1330 P6.4
  Top Layer w50: P6.4 P7.4
  Bottom Layer w10: v1(-1372.32,-25.5) -1480,82.18 -1480,830 -1230,1080 -1002.14,1080 -755,1327.14 P6.4
B1_CELL3: A3.2 A5.3 P6.5 P7.5 | length 4120.5
  Top Layer w10: v1(-1372.32,349.5) -1370.83,351 A3.2 ; A5.3 -1375.31,-74 -1450,0.69 -1450,810 -1214.36,1045.64 -934.36,1045.64 -655,1325 P6.5
  Top Layer w50: P6.5 P7.5
  Bottom Layer w10: v1(-1372.32,349.5) -1450,427.18 -1450,810 -1215,1045 -935,1045 -655,1325 P6.5
B1_CELL4: A1.2 A3.3 P6.6 P7.6 | length 3384.1
  Top Layer w10: v1(-1372.32,724.5) -1370.83,726 A1.2 ; A3.3 -1382.32,301 -1425,343.68 -1425,790 -1205,1010 -915,1010 -555,1370 P6.6
  Top Layer w50: P6.6 P7.6
  Bottom Layer w10: v1(-1372.32,724.5) -1372.32,842.68 -1205,1010 -915,1010 -555,1370 P6.6
B1_CELL5: A1.3 P6.7 P7.7 | length 1722.4
  Top Layer w10: A1.3 -1386,676 -1400,690 -1400,760 -1195,965 -890,965 -455,1400 P6.7
  Top Layer w50: P6.7 P7.7
BOOT: C4.1 U1.1 | length 110.3
  Top Layer w10: C4.1 692.3,1630.15 711,1648.85 U1.1
CAN_RX: U3.17 U4.4 | length 353.2
  Top Layer w10: U4.4 25.98,-1034.55 45.98,-1014.55 250.87,-1014.55 265.87,-999.55 U3.17
CAN_TX: U3.18 U4.1 | length 220.9
  Top Layer w10: U4.1 175.98,-1039.55 185.98,-1029.55 257.08,-1029.55 285.55,-1001.08 U3.18
CANH: P5.2 R12.2 U4.7 | length 912.7
  Top Layer w10: U4.7 125.98,-1345.88 145.1,-1365 248.94,-1365 313.94,-1300 652.68,-1300 680.98,-1328.31 680.98,-1367.06 R12.2 682.48,-1423.91 ; 682.48,-1424.36 749.72,-1491.6 P5.2
CANL: P5.1 R12.1 U4.6 | length 879.3
  Top Layer w10: U4.6 75.98,-1360.98 115,-1400 261.18,-1400 326.18,-1335 585.94,-1335 R12.1 619.49,-1427.61 ; 619.49,-1428.06 670.98,-1479.55 P5.1
COMP: C8.1 R1.1 U1.8 | length 188.5
  Top Layer w10: C8.1 435.7,1733.2 437.81,1735.31 U1.8
DBG_LED_n: LED2.C U3.1 | length 2109
  Top Layer w10: v1(127.68,-564.55) 158.62,-595.5 U3.1 ; v1(1415.94,151.14) LED2.C
  Bottom Layer w10: v1(127.68,-564.55) 577.68,-564.55 613.15,-529.08 613.15,-116.58 645,-84.73 1355.27,-84.73 1415.94,-24.06 v1(1415.94,151.14)
DBG_SW_n: R9.2 S2.A U3.4 | length 2160.8
  Top Layer w10: v1(92.68,-504.55) 57.68,-539.55 57.68,-570.61 141.61,-654.55 U3.4 ; R9.2 R9.2@937.49,86.44 ; v1(1015.91,86.44) R9.2@937.49,86.44 ; S2.A@1250.48,196.42 937.49,196.42 R9.2@937.49,86.44
  Bottom Layer w10: v1(92.68,-504.55) 369.02,-504.55 412.68,-460.89 412.68,-104.55 447.68,-69.55 907.12,-69.55 1015.91,39.23 v1(1015.91,86.44)
GND: A11.2 A12.2 C1.2 C2.2 C5.2 C7.2 C8.2 C9.2 C10.2 C11.1 C12.1 C13.2 C14.2 C15.2 C16.2 C17.2 C18.2 C19.2 C20.2 C21.2 C22.2 C23.2 C24.2 C25.2 C26.2 C27.2 C28.2 C29.2 C30.2 C31.2 C32.2 C33.2 C34.2 C35.2 LED1.C P1.2 P2.7 P3.1 P6.1 P7.1 P8.1 P9.1 R11.2 R15.2 R16.2 R19.2 R20.2 R23.2 R24.2 R27.2 R28.2 R31.2 R32.2 R35.2 R36.2 S1.B S2.B T1.1 T1.2 U1.11 U2.2 U3.3 U3.12 U3.27 U3.32 U3.34 U3.35 U3.39 U3.55 U4.2 U4.8 | length 3081.3
  Top Layer w10: v1(-1364.02,-1149) A11.2 ; C17.2 105.71,-831.72 C16.2 140.24,-831.99 160.2,-812.03 U3.12 ; v1(87.68,-564.55) 157.99,-634.87 U3.3 ; U4.2 125.98,-1159.51 155.47,-1189 244.84,-1189 281.61,-1152.23 281.61,-1123.76 296.89,-1108.49 C21.2 ; C18.2 C20.2 332.99,-343.69 342.13,-334.55 451.54,-334.55 460.98,-344 C13.2 434.72,-372.5 425.67,-381.56 425.67,-454.55 443.03,-471.91 U3.55 ; C19.2 C21.2 ; U3.27 462.72,-993.38 480.98,-1011.65 495.58,-1011.65 507.68,-1023.74 507.68,-1098.49 497.68,-1108.49 C15.2 465.98,-1141.24 457.68,-1149.55 347.68,-1149.55 337.99,-1139.87 C21.2 ; v1(569.5,-840.05) 572.51,-840.05 583.86,-851.4 U3.35 U3.34 ; U3.39 677.68,-772.66 691.34,-759 C14.2 ; C23.2 1015.98,-724.63 v1(1015.91,-724.55) 1015.98,-724.47 C22.2
  Bottom Layer w10: v1(-1364.02,-1149) -1134.7,-1149 -1053.7,-1230 P8.1 ; v1(87.68,-564.55) 37.68,-514.55 37.68,-364.55 97.68,-304.55 v1(132.68,-304.55)
  other v1: -305,-1031.99 30.98,-891.04 -134.02,-775.77 -70,-276.99 -295,93.01 -312.4,468.01
I2C0SCL: P3.4 U3.47 | length 846.9
  Top Layer w10: U3.47 671.5,-615.18 707.13,-579.55 v1(732.68,-579.55)
  Bottom Layer w10: v1(732.68,-579.55) 1097.2,-579.55 1267.2,-409.55 P3.4
I2C0SDA: P3.3 U3.48 | length 776.1
  Top Layer w10: U3.48 669.97,-595.5 692.68,-572.79 v1(692.68,-549.55)
  Bottom Layer w10: v1(692.68,-549.55) 1052.68,-549.55 1188.46,-413.76 P3.3
NetA1_5: A1.5 A1.6 R13.1 | length 160.5
  Top Layer w10: A1.5 A1.6 R13.1
NetA2_5: A2.5 A2.6 R14.1 | length 161.1
  Top Layer w10: A2.5 A2.6 -235.51,-1195.5 R14.1
NetA3_5: A3.5 A3.6 R17.1 | length 160.5
  Top Layer w10: A3.5 A3.6 R17.1
NetA4_5: A4.5 A4.6 R18.1 | length 160.8
  Top Layer w10: A4.5 A4.6 -234.61,-820.5 R18.1
NetA5_5: A5.5 A5.6 R21.1 | length 161.8
  Top Layer w10: A5.5 A5.6 -992.01,-74 R21.1
NetA6_5: A6.5 A6.6 R22.1 | length 161.1
  Top Layer w10: A6.5 A6.6 -343.03,-444 R22.1
NetA7_5: A7.5 A7.6 R25.1 | length 161.1
  Top Layer w10: A7.5 A7.6 -990.51,-449 R25.1
NetA8_5: A8.5 A8.6 R26.1 | length 161
  Top Layer w10: A8.5 A8.6 R26.1
NetA9_5: A9.5 A9.6 R29.1 | length 161.1
  Top Layer w10: A9.5 A9.6 -990.51,-824 R29.1
NetA10_5: A10.5 A10.6 R30.1 | length 161.1
  Top Layer w10: A10.5 A10.6 -235.51,304.5 R30.1
NetA11_5: A11.5 A11.6 R33.1 | length 161.8
  Top Layer w10: A11.5 A11.6 -992.01,-1199 R33.1
NetA12_5: A12.5 A12.6 R34.1 | length 150.9
  Top Layer w10: A12.5 A12.6 -245,679.5 R34.1
NetC2_1: C2.1 L1.2 U2.1
NetC7_1: C7.1 R1.2 | length 80.9
  Top Layer w10: C7.1 293.06,1755 305.78,1742.28 R1.2
NetD1_A: D1.A T1.3 | length 188.3
  Top Layer w10: T1.3 395.36,1307.96 D1.A
NetLED1_A: LED1.A R7.2 | length 74.2
  Top Layer w10: R7.2@1288.98,910.98 R7.2 LED1.A
NetLED2_A: LED2.A R10.2 | length 85.8
  Top Layer w10: R10.2 1478.94,251.97 LED2.A
OSC0: C23.1 U3.40 Y1.2 | length 706.4
  Top Layer w10: U3.40 564.25,-752.98 541.46,-775.77 541.46,-863.33 602.68,-924.55 825.63,-924.55 Y1.2 873.9,-966.99 C23.1
OSC1: C22.1 U3.41 Y1.1 | length 487.6
  Top Layer w10: U3.41 683.94,-733.29 870.98,-546.24 Y1.1 1015.91,-521.09 C22.1
PH: C4.2 D2.C T1.4 U1.10 | length 1060.9
  Top Layer w10: D2.C 174.72,1247.09 191.98,1229.83 v1(253.66,1229.83) 253.66,1126.47 T1.4 ; v1(511.97,1609.33) 511.97,1669.29 524.36,1681.67 524.36,1695.81 524.86,1696.31 U1.10 539,1644.71 553.56,1630.15 C4.2
  Bottom Layer w10: v1(253.66,1229.83) 253.66,1519.29 343.7,1609.33 v1(511.97,1609.33)
RST_N: P2.6 R8.2 S1.A U3.38 | length 1443.6
  Top Layer w10: S1.A@280.79,196.42 593.78,196.42 594.17,196.02 594.17,-11.05 618.7,-35.58 R8.2 657.68,-37.27 P2.6 ; v1(572.68,-792.35) U3.38
  Bottom Layer w10: v1(572.68,-792.35) 657.68,-707.35 P2.6
RT/CLK: R2.1 U1.5 | length 726.4
  Top Layer w10: R2.1 507.87,1462.05 v1(559.41,1462.05) ; U1.5 712.24,1774.31 712.74,1774.81 712.74,1788.96 735,1811.22 v1(775.71,1811.22)
  Bottom Layer w10: v1(559.41,1462.05) 559.41,1676.2 598.21,1715 795,1715 810,1730 810,1776.93 v1(775.71,1811.22)
SS/TR: C3.1 U1.4 | length 728.6
  Top Layer w10: C3.1 v1(295.48,1619.33) ; U1.4 v1(775.71,1755.31)
  Bottom Layer w10: v1(295.48,1619.33) 295.48,1680.79 370.01,1755.31 v1(775.71,1755.31)
TCK/SWCLK: P2.2 R5.2 U3.52 | length 703.3
  Top Layer w10: R5.2 257.68,-37.27 P2.2 257.68,-234.55 292.68,-269.55 482.68,-269.55 502.09,-288.96 U3.52
TDI: P2.5 U3.50 | length 387.8
  Top Layer w10: U3.50 541.46,-220.77 557.68,-204.55 P2.5
TDO/SWO: P2.4 R11.1 U3.49 | length 551.4
  Top Layer w10: R11.1 457.68,-37.27 P2.4 ; U3.49 561.14,-451.09 v1(582.68,-429.55)
  Bottom Layer w10: P2.4 457.68,-304.55 v1(582.68,-429.55)
TMS/SWDIO: P2.3 R6.2 U3.51 | length 629
  Top Layer w10: R6.2 355.98,-142.86 P2.3 357.68,-229.55 382.68,-254.55 502.68,-254.55 521.77,-273.65 U3.51
UART1_RX: P4.1 U3.45 | length 579.2
  Top Layer w10: U3.45 696.73,-654.55 v1(697.68,-655.5)
  Bottom Layer w10: v1(697.68,-655.5) 1073.62,-655.5 1107.13,-689 P4.1
UART1_TX: P4.2 U3.46 | length 575.2
  Top Layer w10: U3.46 673.62,-634.87 683.94,-624.55 v1(732.68,-624.55)
  Bottom Layer w10: v1(732.68,-624.55) 1067.68,-624.55 1081.97,-610.26 P4.2
VDDC: C18.1 C19.1 C20.1 C21.1 U3.25 U3.56 | length 777.7
  Top Layer w10: C20.1 C18.1 408.35,-447.86 408.35,-464.55 423.35,-479.55 U3.56 423.35,-579.12 448.85,-604.62 448.85,-629.33 423.35,-654.83 U3.25 423.35,-997.19 400.98,-1019.55 C19.1 C21.1
Vfused: C1.1 C5.1 C6.1 F1.2 L1.1 U1.2 | length 146.1
  Top Layer w16: U1.2 793.39,1715.31 812.91,1695.79 812.91,1659.68
VSENSE: R3.2 R4.1 U1.7 | length 2076.1
  Top Layer w10: R4.1 v1(216.26,1619.33) ; v1(481.26,1784.53) 483.22,1782.57 483.22,1766.18 494.09,1755.31 U1.7 ; R3.2 v1(886.34,775)
  Bottom Layer w10: v1(481.26,1784.53) 320,1784.53 216.26,1680.79 v1(216.26,1619.33) 216.26,849.9 291.16,775 v1(886.34,775)
pads on no net: A1.8 A2.8 A3.8 A4.8 A5.8 A6.8 A7.8 A8.8 A9.8 A10.8 A11.8 A12.8 U1.3 U1.6 U3.5 U3.10 U3.13 U3.14 U3.15 U3.16 U3.19 U3.20 U3.21 U3.22 U3.23 U3.24 U3.28 U3.29 U3.30 U3.31 U3.33 U3.36 U3.43 U3.44 U3.53 U4.5

## Polygon pours and split planes (outlines as drawn)
GND on Top Layer "top_gnd" (solid, remove dead copper, pour order 22): -2236.67,-323.85 -1836.67,-323.85 -1836.67,323.85 -2236.67,323.85 cw(c0,0) -323.85,2236.67 -323.85,1836.67 323.85,1836.67 323.85,2236.67 cw(c0,0) 2236.67,323.85 1836.67,323.85 1836.67,-323.85 2236.67,-323.85 cw(c0,0) 323.85,-2236.67 323.85,-1836.67 -323.85,-1836.67 -323.85,-2236.67 cw(c0,0)
NetC2_1 on Top Layer "cap_poly" (solid, remove dead copper, pour order 16): 756.02,1364.17 756.02,1261.77 1146.26,1261.77 1146.26,1278.15 1283.3,1278.15 1283.3,1278.9 1283.3,1386.02 985,1386.02 985,1364.17
24V on Top Layer "24v_poly" (solid, pour order 2): 540.04,1985 540.04,1836.67 1068.62,1836.67 1068.62,1965 962.5,1965 961.97,1965.53 961.97,1985
-12V on Top Layer "-12v_poly" (solid, remove dead copper, pour order 4): 90,1696.31 90.37,1695.94 180.91,1695.94 180.91,1496.16 342.85,1496.16 343.18,1530.94 343.18,1584.41 530.87,1584.41 613,1584.41 613,1515.2 455.71,1515.2 455.71,1400 343.18,1400 343.18,1262.6 236.07,1262.6 216.26,1262.6 216.26,1378.15 90,1378.15
+12V on Top Layer "+12v_poly" (solid, remove dead copper, pour order 5): 459.65,1371.87 460.49,1371.02 571.94,1371.02 571.94,1199.21 572.51,1199.79 745.43,1199.79 745.43,710.01 620.43,710.01 620.43,1125 459.65,1125
Vfused on Top Layer "vfused_poly" (solid, remove dead copper, pour order 3): 955,1378.15 585.98,1378.15 585.98,1504.04 624.37,1504.04 624.37,1600.63 769.49,1600.63 769.49,1674.31 1167.24,1674.32 1167.24,1520.77 970,1520.35 970,1378.15
GND on Bottom Layer "bottom_gnd" (solid, remove dead copper, pour order 23): -2236.67,-323.85 -1836.67,-323.85 -1836.67,323.85 -2236.67,323.85 cw(c0,0) -323.85,2236.67 -323.85,1836.67 323.85,1836.67 323.85,2236.67 cw(c0,0) 2236.67,323.85 1836.67,323.85 1836.67,-323.85 2236.67,-323.85 cw(c0,0) 323.85,-2236.67 323.85,-1836.67 -323.85,-1836.67 -323.85,-2236.67 cw(c0,0)

## Other copper
Top Layer:
  pour cut-out: -1795,463.01

## Silkscreen, mask and mechanical layers (free items; w line width, h text height)
Top Overlay:
  text "24V" at 440.66,2105 h30
  text "PWR" at 552.76,2105 h30
  text "-" at 486.98,2060 h30
  text "+" at 571.98,2060 h30
  text "Battery1" at -855,1805 h30
  text "Sub8 Battery Monitor Board" at -1230,1182.14 h30
  text "MIL0019-R1" at -1230,1132.14 h30
  text "Schem Des by Marquez Jones" at -1230,1082.14 h30
  text "Layout by Frank Mitchell" at -1230,1032.14 h30
  text "Reset" at 372.05,444.5 h30
  text "Debug" at 1017.2,444.5 h30
  text "I2C" at 1102.68,-104.55 h30
  text "SDA" at 1147.68,-164.55 h30
  text "SCL" at 1252.68,-164.55 h30
  text "-" at 1022.68,-169.55 h30
  text "+" at 1097.68,-169.55 h30
  text "TCK" at 215.98,-239.55 h30
  text "TMS" at 315.98,-239.55 h30
  text "TDO" at 417.68,-239.55 h30
  text "TDI" at 517.68,-239.55 h30
  text "RST" at 617.68,-239.55 h30
  text "+                   -" at 147.68,-244.55 h30
  text "TX" at 1338.9,-624.98 h30
  text "UART" at 1442.68,-649.55 h30
  text "RX" at 1342.68,-699.55 h30
  text "CAN" at 895,-1565 h30
  text "L" at 665,-1720 h30
  text "H" at 745,-1720 h30
  text "Battery0" at -860,-1860 h30
BO:
  the board outline again, w10